# EAGLE board DeviceDOut24 (EAGLE 5.00)
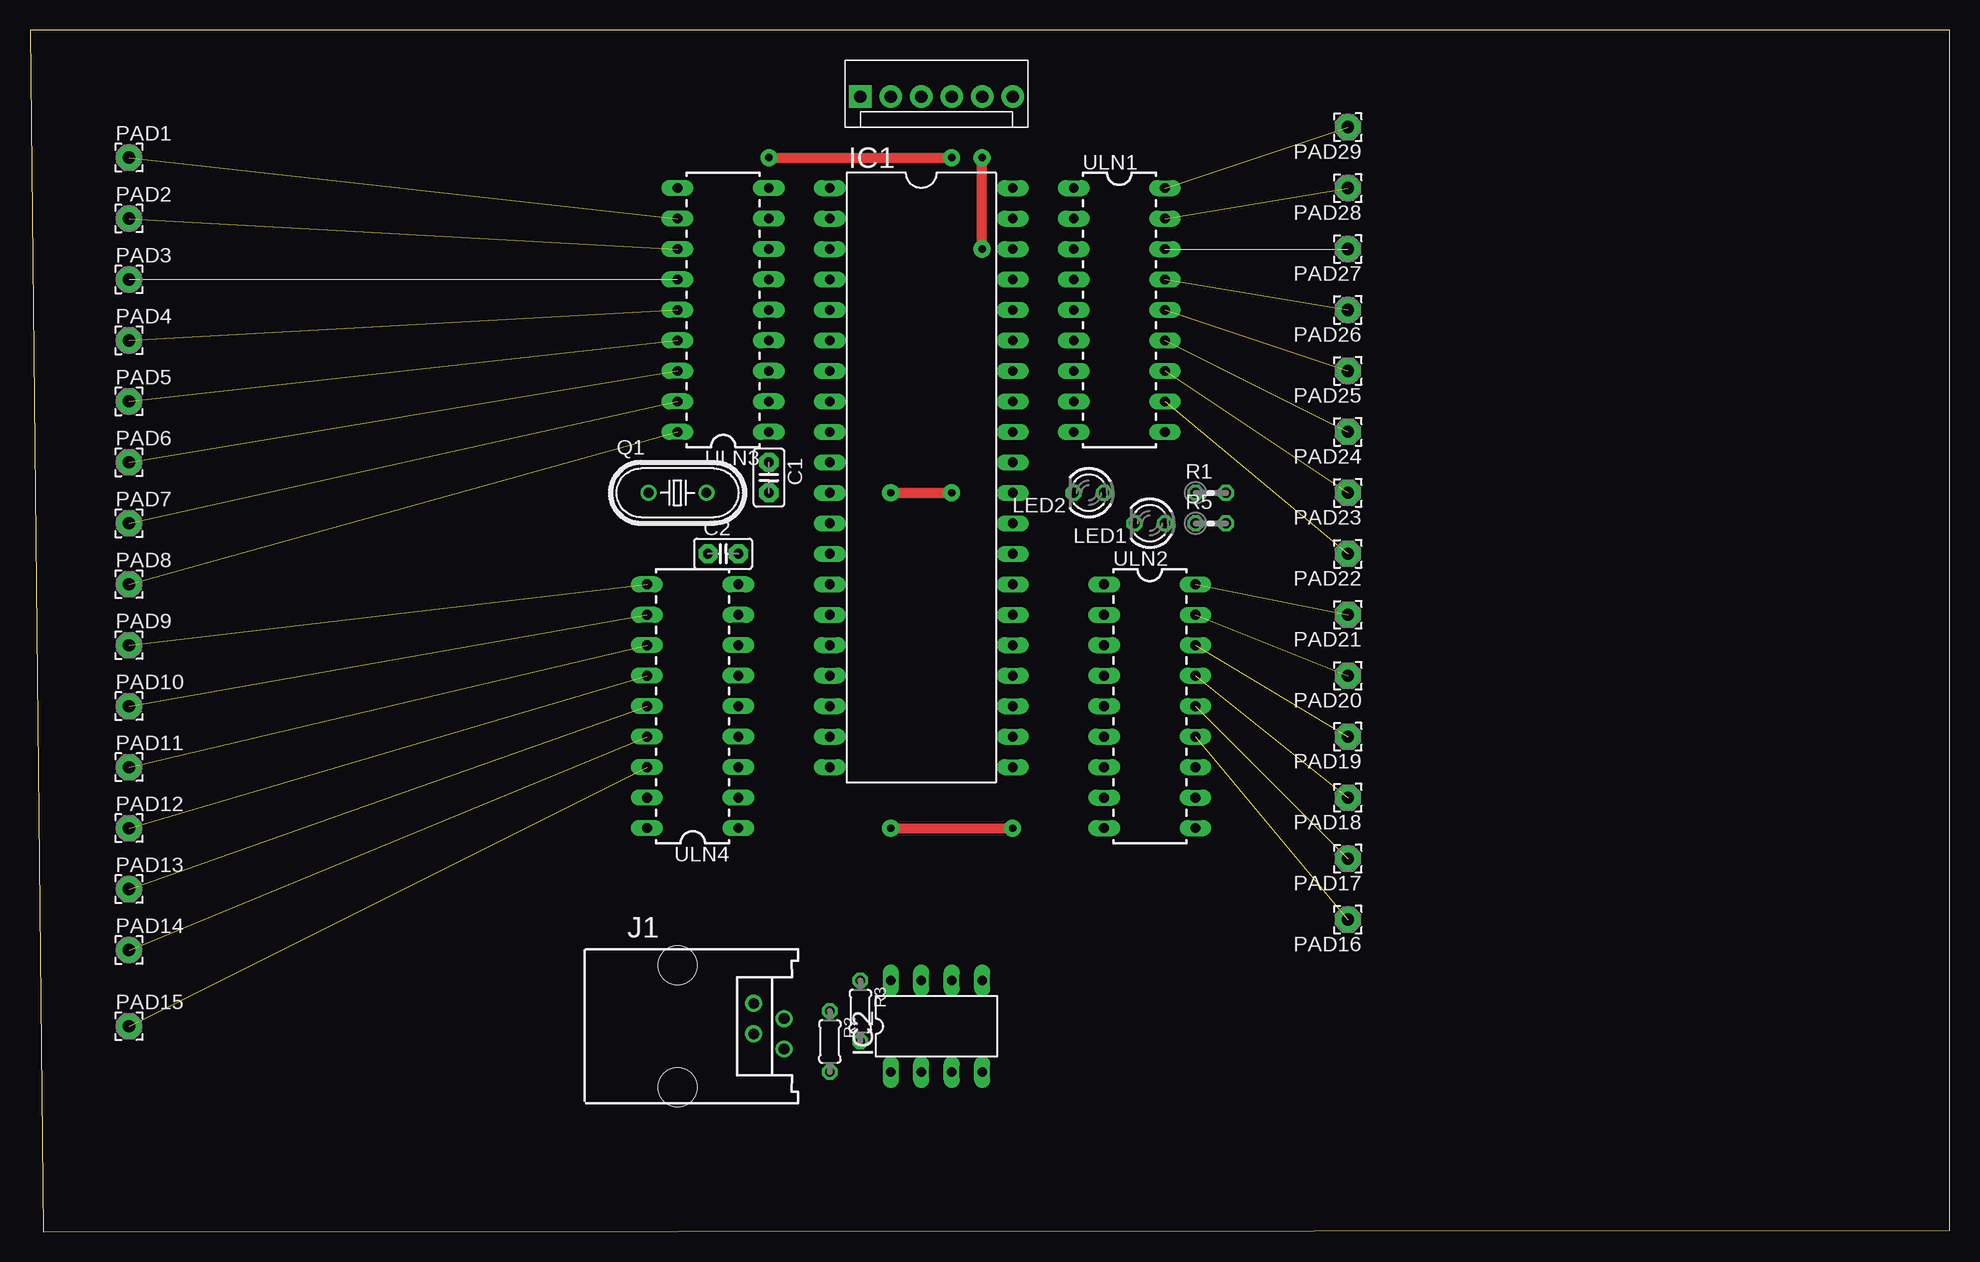
[diagram p0: board, top side]
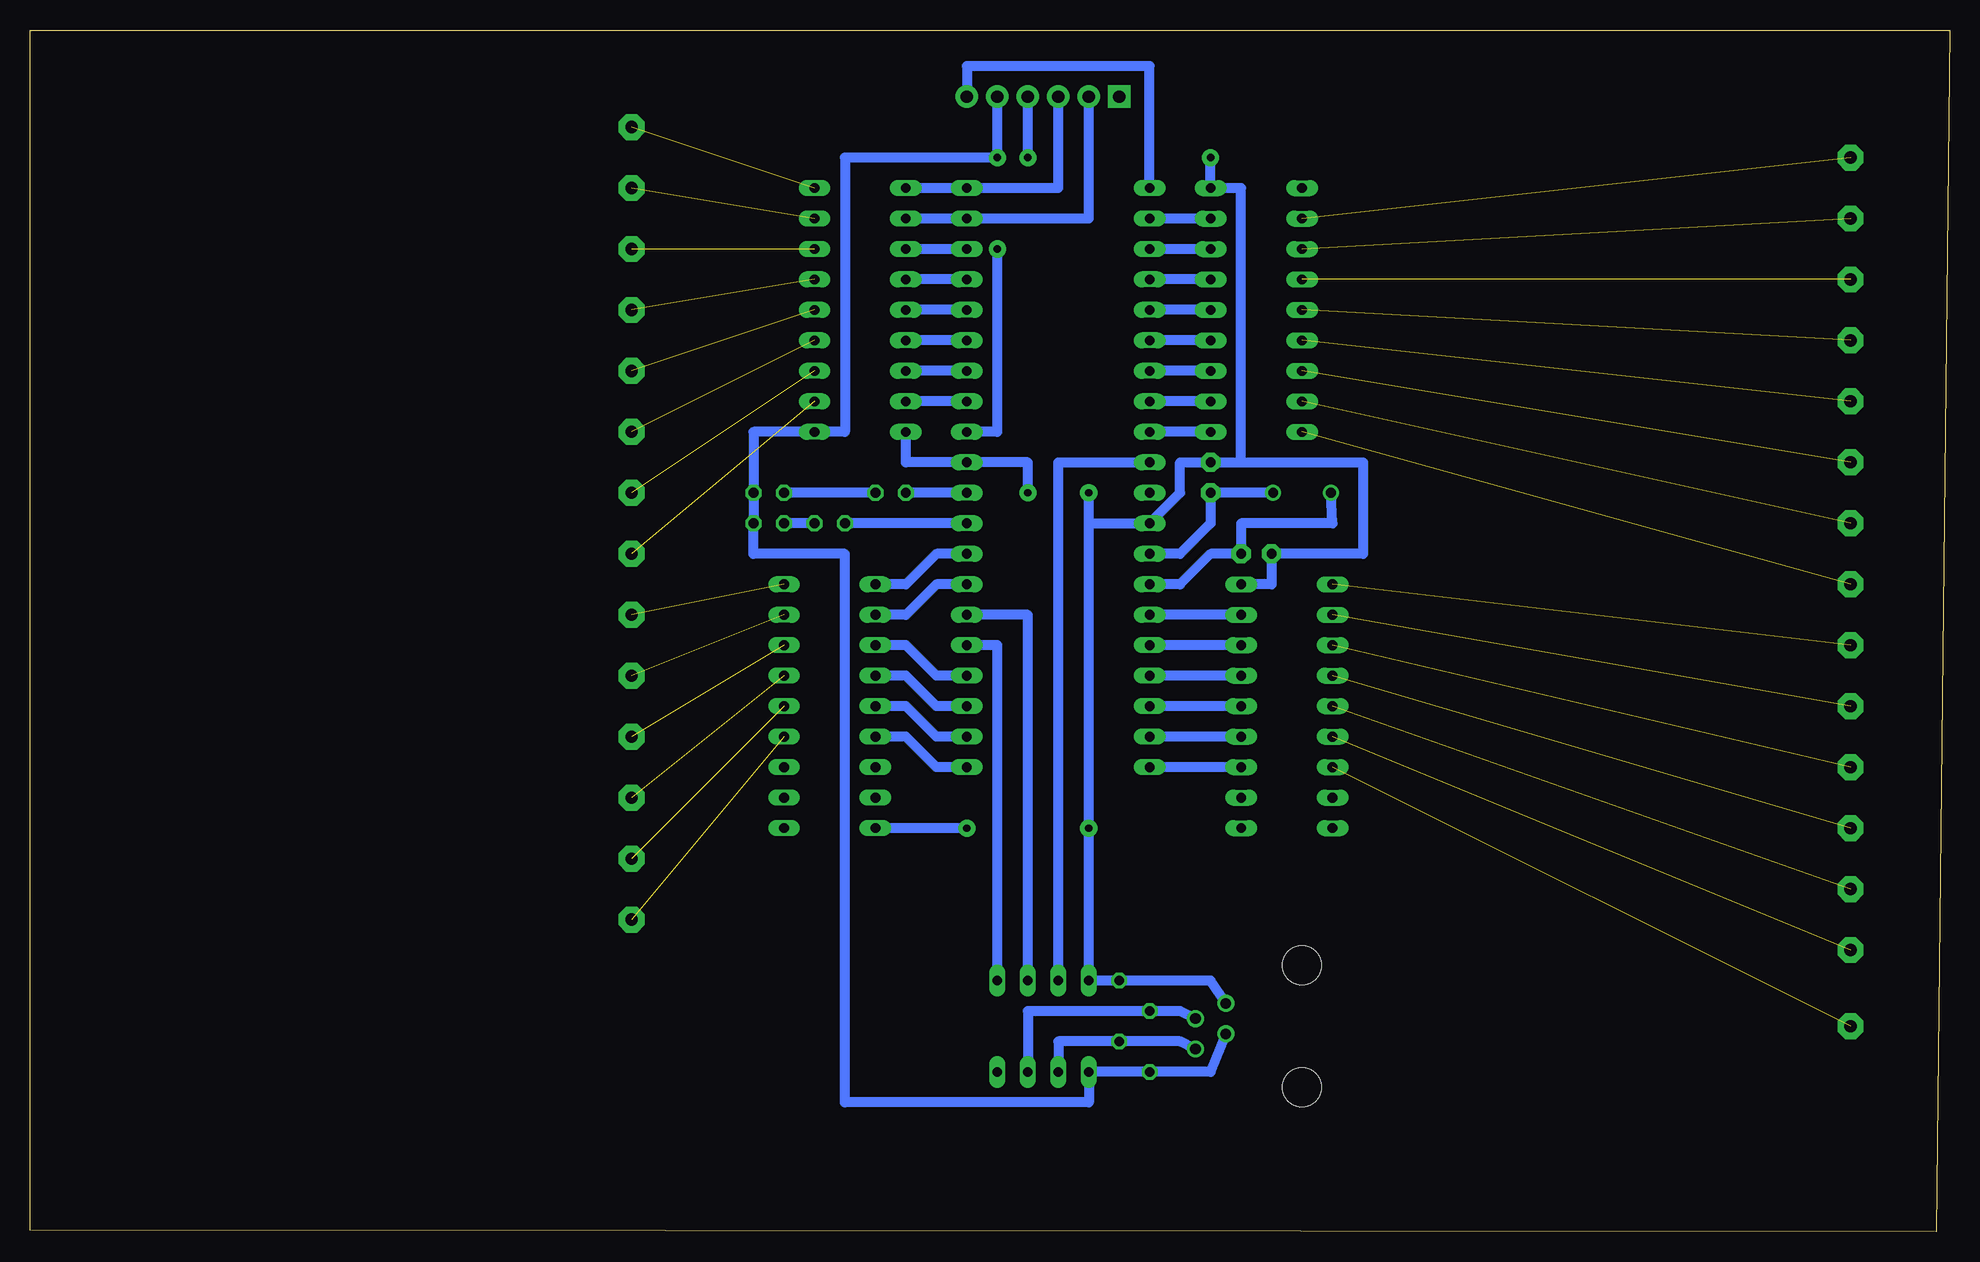
[diagram p1: board, bottom side, seen from below]

Size 160 x 100.16 mm. Coordinates in mm from the lower left corner, seen from the top.
Outline: 1.1,0 160,0.16 160,100.16 0,100.16 1.1,0
Copper layers (1*16): Top 0.035mm / dielectric 1.5mm / Bottom 0.035mm
Design rules "default": minimum track width 10mil, minimum drill 24mil, track to track 8mil, track to pad 8mil, pad to pad 8mil, via to via 8mil, smd to smd 8mil, copper to edge 40mil, drill to drill 8mil, minimum pad ring 10mil, minimum via ring 8mil, stop-mask expansion 4mil, vias tented up to drill 0mil, thermal gap 10mil

## Footprints (pad centres in the part's own frame; a part is rotated, then mirrored left to right if it is on the bottom)
C2.5-2 = drill 0.813 pad 1.6 octagon: 1 -1.27,0; 2 1.27,0
DIL40 = drill 0.813 long: 1 -24.13,-7.62; 2 -21.59,-7.62; 3 -19.05,-7.62; 4 -16.51,-7.62; 5 -13.97,-7.62; 6 -11.43,-7.62; 7 -8.89,-7.62; 8 -6.35,-7.62; 9 -3.81,-7.62; 10 -1.27,-7.62; 11 1.27,-7.62; 12 3.81,-7.62; 13 6.35,-7.62; 14 8.89,-7.62; 15 11.43,-7.62; 16 13.97,-7.62; 17 16.51,-7.62; 18 19.05,-7.62; 19 21.59,-7.62; 20 24.13,-7.62; 21 24.13,7.62; 22 21.59,7.62; 23 19.05,7.62; 24 16.51,7.62; 25 13.97,7.62; 26 11.43,7.62; 27 8.89,7.62; 28 6.35,7.62; 29 3.81,7.62; 30 1.27,7.62; 31 -1.27,7.62; 32 -3.81,7.62; 33 -6.35,7.62; 34 -8.89,7.62; 35 -11.43,7.62; 36 -13.97,7.62; 37 -16.51,7.62; 38 -19.05,7.62; 39 -21.59,7.62; 40 -24.13,7.62
DIL8 = drill 0.813 long: 1 -3.81,-3.81; 2 -1.27,-3.81; 3 1.27,-3.81; 4 3.81,-3.81; 5 3.81,3.81; 6 1.27,3.81; 7 -1.27,3.81; 8 -3.81,3.81
215876-6 = drill 0.889 round: 1 -1.905,6.35; 2 -0.635,8.89; 3 0.635,6.35; 4 1.905,8.89 | hole 3.251: -5.08,0; 5.08,0
LED3MM = drill 0.813 octagon: A -1.27,0; K 1.27,0
2,15/1,0 = drill 1.016 pad 2.159 octagon: 1 0,0
HC49U70 = drill 0.813 round: 1 -2.413,0; 2 2.413,0
0204V = drill 0.813 octagon: 1 -1.27,0; 2 1.27,0
0204/5 = drill 0.813 octagon: 1 -2.54,0; 2 2.54,0
MOLEX-1X6 = drill 1.016 pad 1.88 square: 1 0,0 | drill 1.016 pad 1.88 round: 2 2.54,0; 3 5.08,0; 4 7.62,0; 5 10.16,0; 6 12.7,0
DIL18 = drill 0.813 long: 1 -10.16,-3.81; 2 -7.62,-3.81; 3 -5.08,-3.81; 4 -2.54,-3.81; 5 0,-3.81; 6 2.54,-3.81; 7 5.08,-3.81; 8 7.62,-3.81; 9 10.16,-3.81; 10 10.16,3.81; 11 7.62,3.81; 12 5.08,3.81; 13 2.54,3.81; 14 0,3.81; 15 -2.54,3.81; 16 -5.08,3.81; 17 -7.62,3.81; 18 -10.16,3.81

## Placement (x,y rotation side)
C1  [C2.5-2]  61.59,62.86 270 top
C2  [C2.5-2]  57.78,56.51 0 top
IC1  PIC16F874P  [DIL40]  74.29,62.86 270 top
IC2  PIC12F629P  [DIL8]  75.56,17.14 0 top
J1  [215876-6]  53.97,17.14 270 top
LED1  [LED3MM]  93.34,59.05 180 top
LED2  [LED3MM]  88.26,61.59 180 top
PAD1  [2,15/1,0]  8.25,89.53 0 top
PAD2  [2,15/1,0]  8.25,84.45 0 top
PAD3  [2,15/1,0]  8.25,79.37 0 top
PAD4  [2,15/1,0]  8.25,74.29 0 top
PAD5  [2,15/1,0]  8.25,69.21 0 top
PAD6  [2,15/1,0]  8.25,64.13 0 top
PAD7  [2,15/1,0]  8.25,59.05 0 top
PAD8  [2,15/1,0]  8.25,53.97 0 top
PAD9  [2,15/1,0]  8.25,48.89 0 top
PAD10  [2,15/1,0]  8.25,43.81 0 top
PAD11  [2,15/1,0]  8.25,38.73 0 top
PAD12  [2,15/1,0]  8.25,33.65 0 top
PAD13  [2,15/1,0]  8.25,28.57 0 top
PAD14  [2,15/1,0]  8.25,23.49 0 top
PAD15  [2,15/1,0]  8.25,17.14 0 top
PAD16  [2,15/1,0]  109.85,26.03 180 top
PAD17  [2,15/1,0]  109.85,31.11 180 top
PAD18  [2,15/1,0]  109.85,36.19 180 top
PAD19  [2,15/1,0]  109.85,41.27 180 top
PAD20  [2,15/1,0]  109.85,46.35 180 top
PAD21  [2,15/1,0]  109.85,51.43 180 top
PAD22  [2,15/1,0]  109.85,56.51 180 top
PAD23  [2,15/1,0]  109.85,61.59 180 top
PAD24  [2,15/1,0]  109.85,66.67 180 top
PAD25  [2,15/1,0]  109.85,71.75 180 top
PAD26  [2,15/1,0]  109.85,76.83 180 top
PAD27  [2,15/1,0]  109.85,81.91 180 top
PAD28  [2,15/1,0]  109.85,86.99 180 top
PAD29  [2,15/1,0]  109.85,92.07 180 top
Q1  [HC49U70]  53.97,61.59 0 top
R1  [0204V]  98.42,61.59 0 top
R2  [0204/5]  66.67,15.87 270 top
R3  [0204/5]  69.21,18.41 270 top
R5  [0204V]  98.42,59.05 0 top
U$3  PIC-ICSPPTH  [MOLEX-1X6]  69.21,94.61 0 top
ULN1  [DIL18]  90.8,76.83 270 top
ULN2  [DIL18]  93.34,43.81 270 top
ULN3  [DIL18]  57.78,76.83 90 top
ULN4  [DIL18]  55.24,43.81 90 top

## Library data of the parts
C1 C2 = capacitor-wima
IC1 IC2 = microchip
J1 = con-amp
LED1 LED2 = led
PAD1-PAD29 = wirepad
Q1 = crystal
R1-R3 R5 = resistor
U$3 ULN1-ULN4 = SparkFun

## Nets
5V: IC1.32 IC2.1 J1.3 R1.2 R2.2 R5.2 U$3.5
GND: C1.1 C2.1 IC1.12 IC1.31 IC2.8 J1.1 R3.1 U$3.4 ULN1.9 ULN2.9 ULN3.9 ULN4.9
N$1: IC1.1 U$3.6
N$2: IC1.40 U$3.3 ULN1.1
N$3: IC1.28 ULN2.1
N$4: IC1.27 ULN2.2
N$5: C1.2 IC1.13 Q1.2
N$6: C2.2 IC1.14 Q1.1
N$7: IC1.26 IC2.6
N$10: IC1.39 U$3.2 ULN1.2
N$11: IC1.38 ULN1.3
N$12: IC1.37 ULN1.4
N$13: IC1.36 ULN1.5
N$14: IC1.35 ULN1.6
N$15: IC1.30 LED2.K
N$16: IC1.24 ULN2.3
N$17: IC1.23 ULN2.4
N$18: IC1.22 ULN2.5
N$19: IC1.21 ULN2.6
N$20: IC1.15 ULN4.8
N$21: IC1.16 ULN4.7
N$22: IC1.17 ULN4.6
N$23: IC1.18 ULN4.5
N$24: IC1.2 ULN3.8
N$25: IC1.3 ULN3.7
N$26: IC1.4 ULN3.6
N$27: IC1.5 ULN3.5
N$28: IC1.6 ULN3.4
N$29: IC1.7 ULN3.3
N$30: IC1.8 ULN3.2
N$31: IC1.9 ULN3.1
N$32: IC1.19 ULN4.4
N$33: IC1.20 ULN4.3
N$34: LED2.A R1.1
N$35: LED1.A R5.1
N$36: PAD1.1 ULN3.11
N$37: PAD2.1 ULN3.12
N$38: PAD3.1 ULN3.13
N$39: PAD4.1 ULN3.14
N$40: IC1.34 ULN1.7
N$41: IC1.33 ULN1.8
N$42: PAD5.1 ULN3.15
N$43: PAD6.1 ULN3.16
N$44: PAD7.1 ULN3.17
N$45: PAD8.1 ULN3.18
N$46: PAD9.1 ULN4.10
N$47: PAD10.1 ULN4.11
N$48: PAD11.1 ULN4.12
N$49: PAD12.1 ULN4.13
N$50: PAD13.1 ULN4.14
N$51: PAD14.1 ULN4.15
N$52: PAD15.1 ULN4.16
N$53: PAD16.1 ULN2.13
N$54: PAD17.1 ULN2.14
N$55: PAD18.1 ULN2.15
N$56: PAD19.1 ULN2.16
N$57: PAD20.1 ULN2.17
N$58: PAD21.1 ULN2.18
N$59: PAD22.1 ULN1.11
N$60: PAD23.1 ULN1.12
N$61: PAD24.1 ULN1.13
N$62: PAD25.1 ULN1.14
N$63: PAD26.1 ULN1.15
N$64: PAD27.1 ULN1.16
N$65: PAD28.1 ULN1.17
N$66: PAD29.1 ULN1.18
N$67: IC1.29 LED1.K
N$68: IC2.3 J1.2 R2.1
N$69: IC2.2 J1.4 R3.2
N$71: IC1.10 IC2.7
N$73: IC1.25 IC2.5
VDD: IC1.11

## Tracks (layer width: path | path; a pad name or v marks a point on that pad's centre or on a via)
5V  (via drill 0.6 pad 1.42)
  Top 0.813: v79.37,81.91 v79.37,89.53
  Bottom 0.813: U$3.5 v79.37,89.53 92.07,89.53 92.07,66.67 99.69,66.67 R1.2 R5.2 99.69,56.51 92.07,56.51 92.07,10.79 71.75,10.79 IC2.1 R2.2 61.59,13.33 J1.3 | v79.37,81.91 79.37,66.67 IC1.32
GND  (via drill 0.6 pad 1.42)
  Top 0.813: v61.59,89.53 v76.83,89.53 | v71.75,33.65 v81.91,33.65 | v71.75,61.59 v76.83,61.59
  Bottom 0.813: ULN4.9 56.51,53.97 C2.1 48.89,56.51 48.89,64.13 C1.1 | ULN1.9 86.99,64.13 IC1.31 76.83,64.13 v76.83,61.59 | v76.83,89.53 U$3.4 | v61.59,89.53 ULN3.9 59.05,86.99 59.05,64.13 C1.1 | C1.1 64.13,64.13 64.13,61.59 IC1.12 71.75,59.05 | 71.75,59.05 v71.75,33.65 IC2.8 R3.1 61.59,20.95 J1.1 | v81.91,33.65 ULN2.9 | 71.75,59.05 v71.75,61.59
N$1
  Bottom 0.813: IC1.1 66.67,97.15 81.91,97.15 U$3.6
N$2
  Bottom 0.813: ULN1.1 IC1.40 74.29,86.99 U$3.3
N$3
  Bottom 0.813: IC1.28 84.45,56.51 86.99,53.97 ULN2.1
N$4
  Bottom 0.813: IC1.27 84.45,53.97 86.99,51.43 ULN2.2
N$5
  Bottom 0.813: IC1.13 64.13,56.51 61.59,59.05 C1.2 Q1.2
N$6
  Bottom 0.813: IC1.14 64.13,53.97 61.59,56.51 C2.2 59.05,59.05 51.43,59.05 Q1.1
N$7
  Bottom 0.813: IC2.6 76.83,51.43 IC1.26
N$10
  Bottom 0.813: U$3.2 71.75,84.45 IC1.39 ULN1.2
N$11
  Bottom 0.813: IC1.38 ULN1.3
N$12
  Bottom 0.813: IC1.37 ULN1.4
N$13
  Bottom 0.813: IC1.36 ULN1.5
N$14
  Bottom 0.813: IC1.35 ULN1.6
N$15
  Bottom 0.813: IC1.30 LED2.K
N$16
  Bottom 0.813: IC1.24 84.45,46.35 86.99,48.89 ULN2.3
N$17
  Bottom 0.813: IC1.23 84.45,43.81 86.99,46.35 ULN2.4
N$18
  Bottom 0.813: IC1.22 84.45,41.27 86.99,43.81 ULN2.5
N$19
  Bottom 0.813: IC1.21 84.45,38.73 86.99,41.27 ULN2.6
N$20
  Bottom 0.813: ULN4.8 IC1.15
N$21
  Bottom 0.813: ULN4.7 IC1.16
N$22
  Bottom 0.813: ULN4.6 IC1.17
N$23
  Bottom 0.813: ULN4.5 IC1.18
N$24
  Bottom 0.813: ULN3.8 IC1.2
N$25
  Bottom 0.813: ULN3.7 IC1.3
N$26
  Bottom 0.813: ULN3.6 IC1.4
N$27
  Bottom 0.813: ULN3.5 IC1.5
N$28
  Bottom 0.813: ULN3.4 IC1.6
N$29
  Bottom 0.813: ULN3.3 IC1.7
N$30
  Bottom 0.813: ULN3.2 IC1.8
N$31
  Bottom 0.813: ULN3.1 IC1.9
N$32
  Bottom 0.813: ULN4.4 IC1.19
N$33
  Bottom 0.813: ULN4.3 IC1.20
N$34
  Bottom 0.813: LED2.A R1.1
N$35
  Bottom 0.813: LED1.A R5.1
N$36  (1 unrouted)
N$37  (1 unrouted)
N$38  (1 unrouted)
N$39  (1 unrouted)
N$40
  Bottom 0.813: IC1.34 ULN1.7
N$41
  Bottom 0.813: IC1.33 ULN1.8
N$42  (1 unrouted)
N$43  (1 unrouted)
N$44  (1 unrouted)
N$45  (1 unrouted)
N$46  (1 unrouted)
N$47  (1 unrouted)
N$48  (1 unrouted)
N$49  (1 unrouted)
N$50  (1 unrouted)
N$51  (1 unrouted)
N$52  (1 unrouted)
N$53  (1 unrouted)
N$54  (1 unrouted)
N$55  (1 unrouted)
N$56  (1 unrouted)
N$57  (1 unrouted)
N$58  (1 unrouted)
N$59  (1 unrouted)
N$60  (1 unrouted)
N$61  (1 unrouted)
N$62  (1 unrouted)
N$63  (1 unrouted)
N$64  (1 unrouted)
N$65  (1 unrouted)
N$66  (1 unrouted)
N$67
  Bottom 0.813: IC1.29 LED1.K
N$68
  Bottom 0.813: J1.2 64.13,18.41 R2.1 76.83,18.41 IC2.3
N$69
  Bottom 0.813: J1.4 64.13,15.87 R3.2 74.29,15.87 IC2.2
N$71
  Bottom 0.813: IC1.10 74.29,64.13 IC2.7
N$73
  Bottom 0.813: IC2.5 79.37,48.89 IC1.25